# Altium PCB Board Assembly.PcbDoc (part 1 of 3)
Units mil, origin at the board's own origin, x right, y up, seen from the top; angles counter-clockwise.
Board outline 3645 x 2655 mil, 2 copper layers (Top Layer, Bottom Layer); 97 components, 111 nets, 464 pads, 100 vias.
Unrouted connection lines stored in the file: 11.
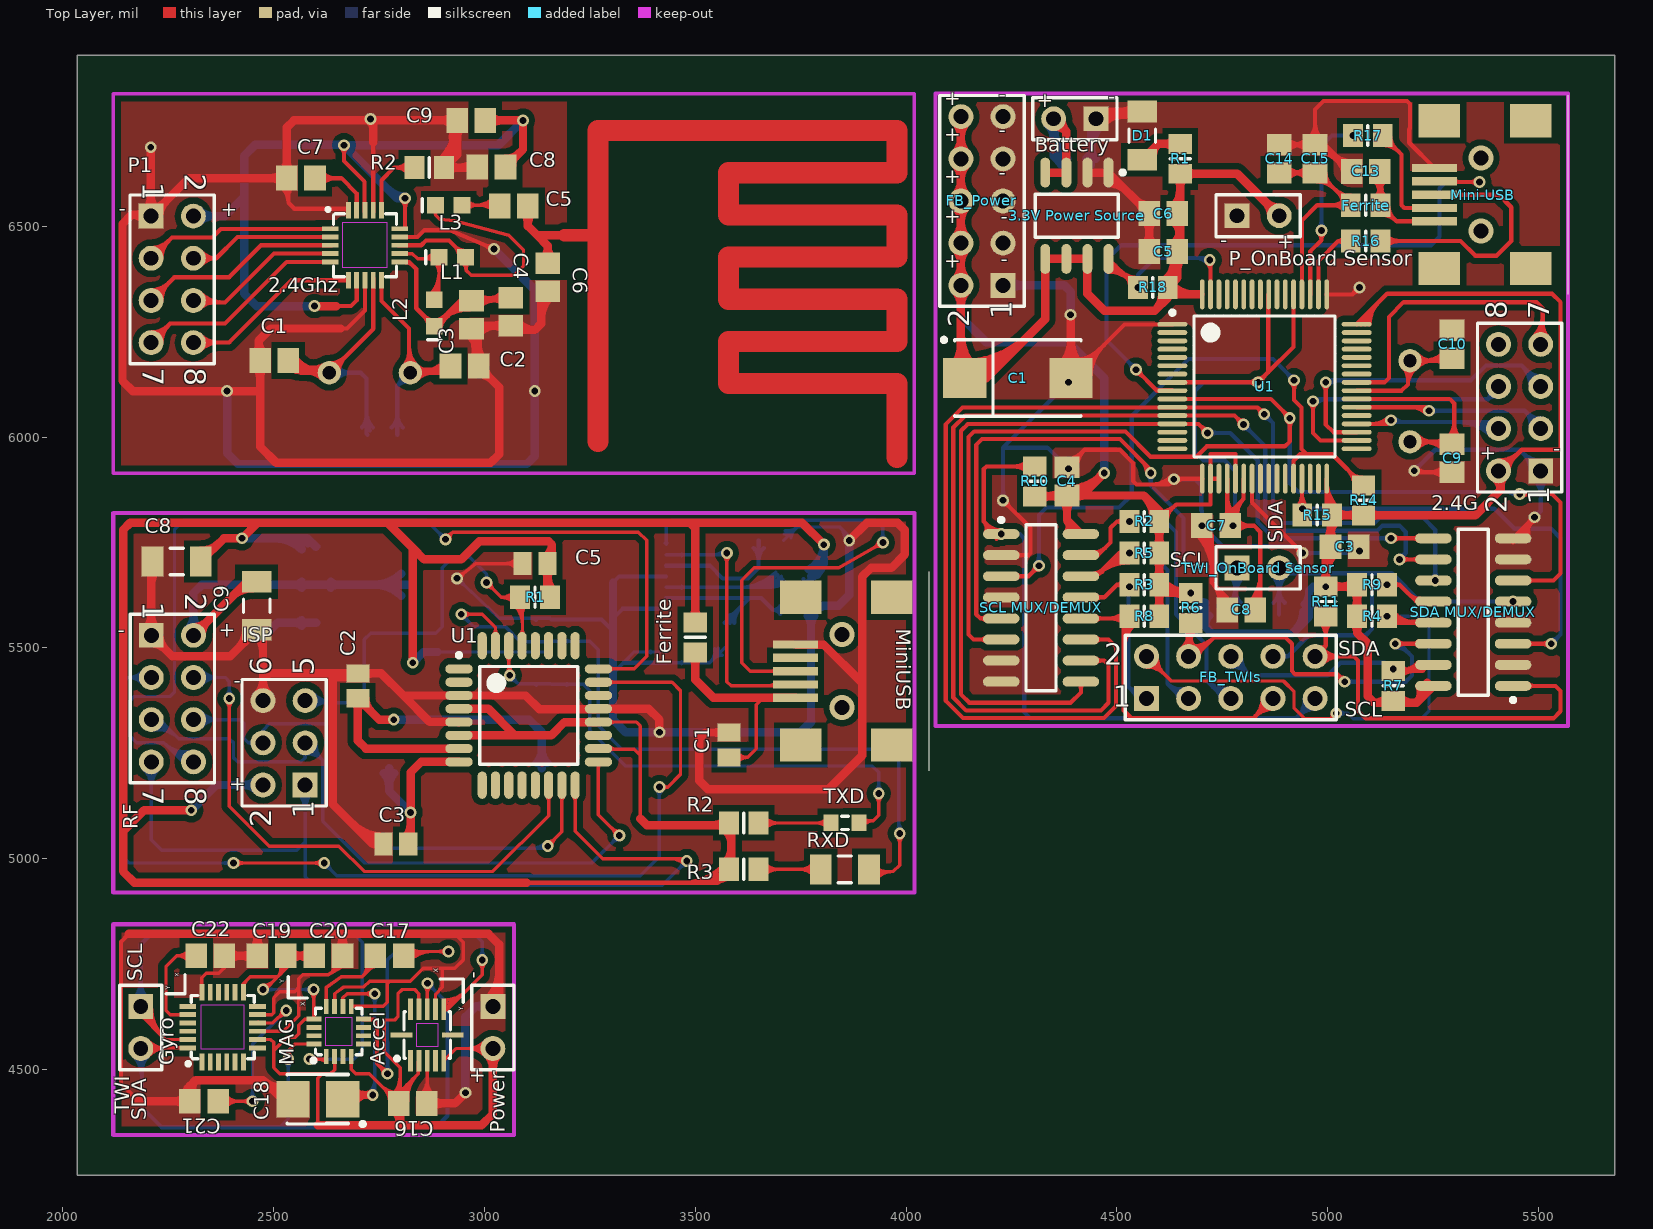
[diagram p0: Top Layer view]
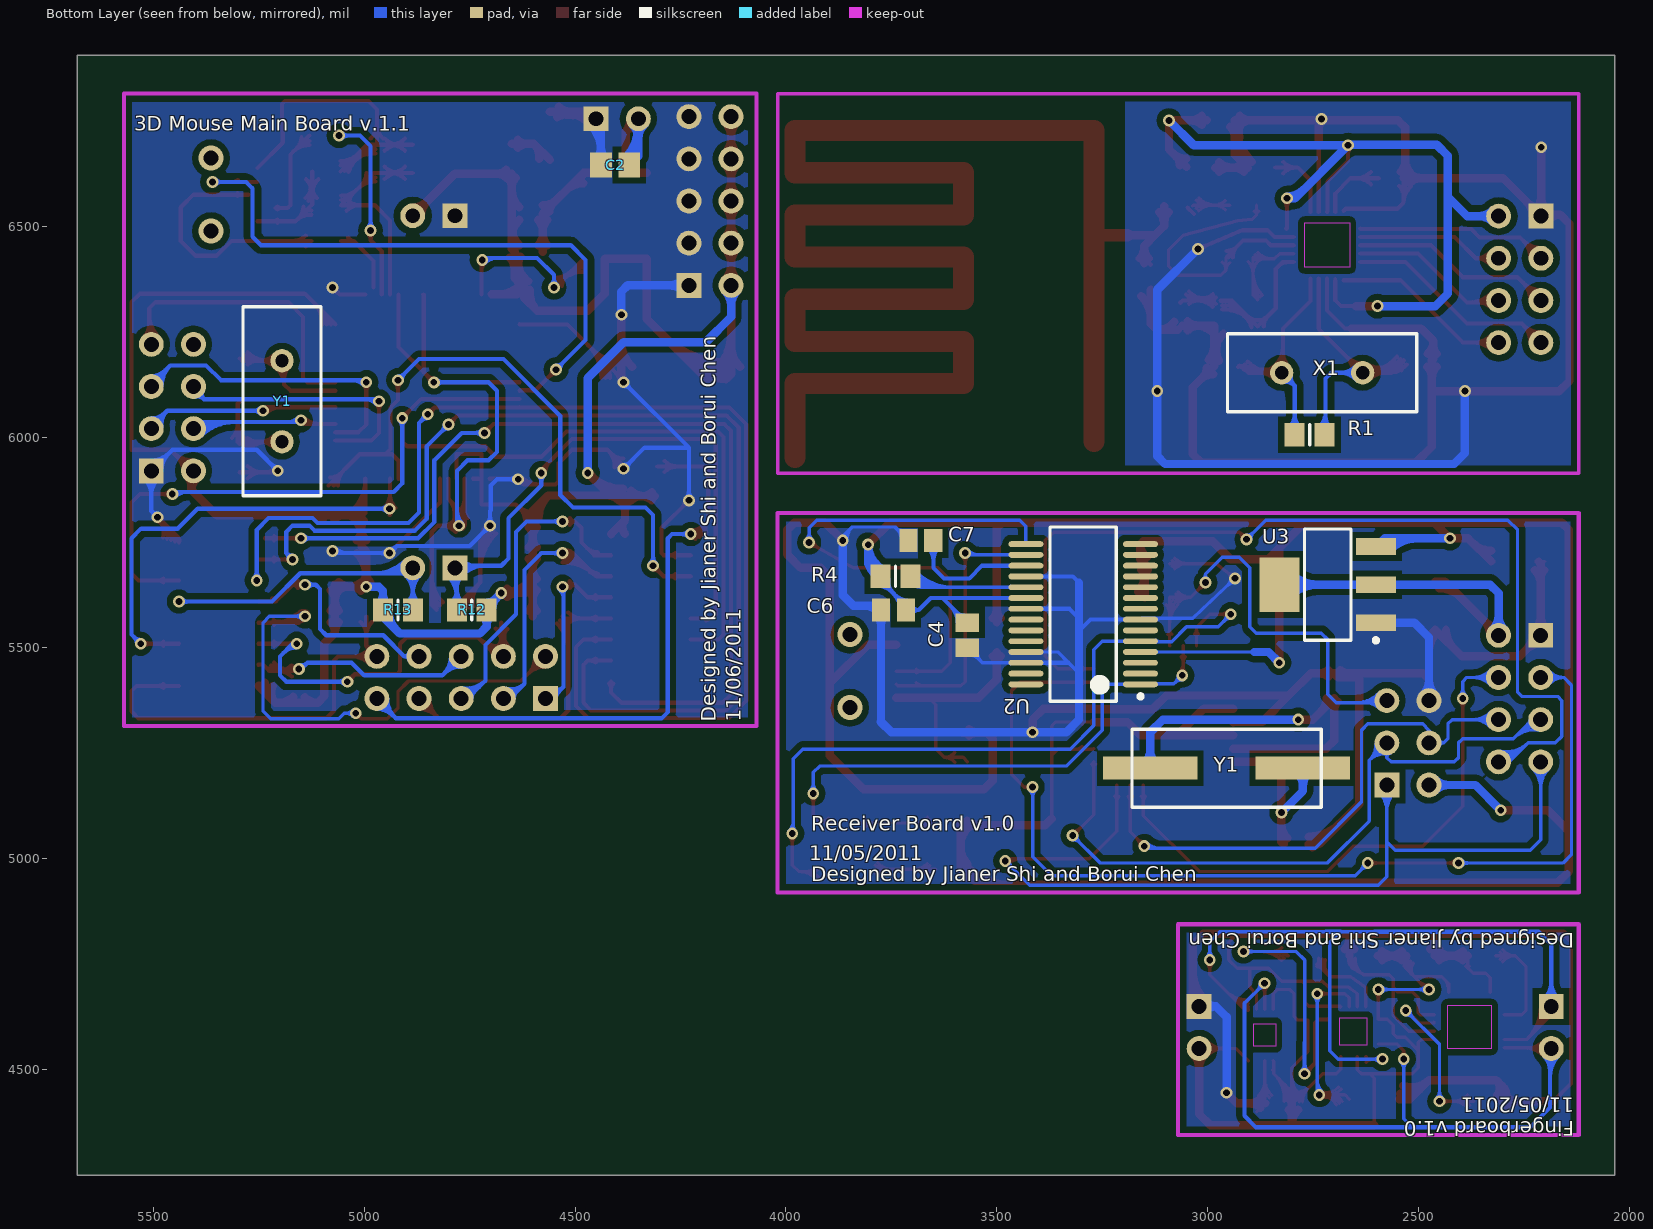
[diagram p1: Bottom Layer view, seen from below]

## Layer stack, top to bottom
Top Layer: signal copper 1.4
Dielectric: dielectric 12.6, FR-4, Dk 4.8
Bottom Layer: signal copper 1.4

## Board outline
2035,4250 5680,4250 5680,6905 2035,6905

## Design rules (kind name [scope] priority, off if disabled: settings)
Clearance "Polygon Clearance" [InPolygon] p1: gap=15
Clearance [All] p2: gap=8.1
HoleSize [All] p1: absolutevalues=TRUE maxlimit=100 minlimit=16 maxpercent=80.000 minpercent=20.000
MinimumAnnularRing [All] p1: minimumring=6
PolygonConnect [All] p1: connectstyle=Direct reliefconductorwidth=10 reliefentries=4 polygonreliefangle="90 Angle"
RoutingVias [All] p1: holewidth=16 width=28 viastyle="Through Hole" minholewidth=16 minwidth=27 maxholewidth=16 maxwidth=35
SilkscreenOverComponentPads [All] p1: minsilkscreentomaskgap=10
SolderMaskExpansion [All] p1: expansion=4
Width [All] p1: maxlimit=50 minlimit=8 preferedwidth=8
26 further rules are at their usual default settings.

## Components (designator, comment, footprint, x,y, rotation, side; value= is the part's Value field where it differs from the comment)
2.4G "Header 4X2" HDR2X4 5505,5920 r90 top
2.4Ghz "nRF24L01+" nRF24L01+ 2645.85,6494.23 r0 top (schematic designator "2.4Ghz Chip")
"3.3V Power Source" "TPS7333Q" SOIC127P600-8BN 4405,6525 r270 top
Accel "BMA180" "BMA180 - ECESHOP" 2825,4535 r0 top
Battery "Header 2" HDR1X2 4450,6755 r180 top
C1 "Cap Pol1" TC7343-2917 4265,6140 r0 top
C1 "Cap Semi" CAPC2012L 3580,5270 r90 top
C1 "Cap Semi" CAPC2012N 2501.5,6182.13 r0 top
C2 "Cap Semi" CAPC2012N 4405,6645 r180 bottom
C2 "Cap Semi" CAPC2012L 2700,5410 r270 top
C2 "Cap Semi" CAPC2012N 2953.04,6168.79 r180 top
C3 "Cap Semi" CAPC2012N 5040,5740 r180 top
C3 "Cap Semi" CAPC2012L 2790,5035 r0 top
C3 "Cap Semi" CAPC2012N 2969.33,6290.01 r90 top
C4 "Cap Semi" CAPC2012N 4381.54,5895 r270 top
C4 "Cap Semi" CAPC2012L 3570,5530 r90 bottom
C4 "Cap Semi" CAPC2012N 3062.56,6297.26 r90 top
C5 "Cap Semi" CAPC2012N 4610,6440 r0 top
C5 "Cap Semi" CAPC2012L 3120,5700 r0 top
C5 "Cap Semi" CAPC2012N 3069.81,6547.96 r180 top
C6 "Cap Semi" CAPC2012N 4610,6530 r0 top
C6 "Cap Semi" CAPC2012L 3745,5590 r180 bottom
C6 "Cap Semi" CAPC2012N 3150.31,6379.03 r90 top
C7 "Cap Semi" CAPC2012N 4735,5790 r0 top
C7 "Cap Semi" CAPC2012L 3680,5755 r0 bottom
C7 "Cap Semi" CAPC2012N 2564.69,6614.11 r0 top
C8 "Cap Semi" CAPC2012N 4795,5590 r0 top
C8 "Cap Pol3 TANT" capc3216n 2270,5705 r180 top
C8 "Cap Semi" CAPC2012N 3016.57,6640.58 r0 top
C9 "Cap Semi" CAPC2012N 5295,5950 r90 top
C9 "Cap Pol3 TANT" capc3216n 2460,5600 r270 top
C9 "Cap Semi" CAPC2012N 2968.71,6751.12 r0 top
C10 "Cap Semi" CAPC2012N 5295,6220 r270 top
C13 "Cap Semi" CAPC2012N 5090,6630 r180 top
C14 "Cap Semi" CAPC2012N 4885,6660 r90 top
C15 "Cap Semi" CAPC2012N 4970,6660 r90 top
C16 "Cap Semi" CAPC2012N 2830,4420 r180 top
C17 "Cap Semi" CAPC2012N 2775,4770 r180 top
C18 "Cap Pol1" TC3528-1411 2605,4430 r180 top
C19 "Cap Semi" CAPC2012N 2495,4770 r0 top
C20 "Cap Semi" CAPC2012N 2630,4770 r180 top
C21 "Cap Semi" CAPC2012N 2335,4425 r0 top
C22 "Cap Semi" CAPC2012N 2350,4770 r180 top
D1 "LED2" RESC3216N 4560,6715 r90 top
FB_Power "Header 5X2" HDR2X5 4230,6360 r90 top
FB_TWIs "Header 5X2" HDR2X5 4570,5380 r0 top
Ferrite "Ferrite Bead" RESC2012N 5090,6550 r180 top
Ferrite "Ferrite Bead 1A" RESC2012N 3500,5525 r90 top
Gyro "IMU3000" "IMU3000 - ECESHOP" 2330,4530 r90 top
ISP "Header 3X2" HDR2X3 2575,5175 r90 top
L1 "Inductor" INDC1608N 2923.75,6426.76 r0 top
L2 "Inductor" INDC1608N 2881.27,6294.15 r90 top
L3 "Inductor" INDC1608N 2915.46,6550.04 r0 top
MAG "HMC5883L" "HMC5883L - ECESHOP" 2625,4540 r90 top
Mini-USB "Mini USB" "MINI USB" 5570,6575 r180 top
MiniUSB "Mini USB" "MINI USB" 4055,5445 r180 top
P1 "Header 4X2" HDR2X4 2209.69,6524.11 r270 top
"P_OnBoard Sensor" "P_OnBoard Sensor" HDR1X2 4785,6525 r0 top
Power "Header 2" HDR1X2 3020,4650 r270 top
R1 "Res3" RESC2012N 4650,6660 r90 top
R1 "Res3" RESC2012N 3120,5620 r0 top
R1 "Res2" RESC2012N 2758.04,6005.61 r0 bottom
R2 "Res3" RESC2012N 4565,5800 r180 top
R2 "Res3" RESC2012N 3615,5085 r0 top
R2 "Res3" RESC2012N 2869.22,6639.11 r0 top
R3 "Res3" RESC2012N 4565,5650 r180 top
R3 "Res3" RESC2012N 3615,4975 r0 top
R4 "Res3" RESC2012N 5105,5575 r0 top
R4 "Res3" RESC2012N 3740,5670 r180 bottom
R5 "Res3" RESC2012N 4565,5725 r180 top
R6 "Res3" RESC2012N 4675,5595 r270 top
R7 "Res3" RESC2012N 5155,5410 r90 top
R8 "Res3" RESC2012N 4565,5575 r180 top
R9 "Res3" RESC2012N 5105,5650 r0 top
R10 "Res3" RESC2012N 4305,5895 r90 top
R11 "Res3" RESC2012N 4995,5610 r270 top
R12 "Res3" RESC2012N 4745,5590 r0 bottom
R13 "Res3" RESC2012N 4920,5590 r180 bottom
R14 "Res3" RESC2012N 5085,5850 r270 top
R15 "Res3" RESC2012N 4975,5815 r0 top
R16 "Res3" RESC2012N 5090,6465 r180 top
R17 "Res3" RESC2012N 5095,6715 r180 top
R18 "Res3" RESC2012N 4585,6355 r0 top
RF "Header 4X2" HDR2X4 2210,5530 r270 top (schematic designator "RF Board")
RXD "LED2" RESC3216N 3855,4975 r0 top
"SCL MUX/DEMUX" "74LV4051" SOIC127P600-16N 4320,5595 r0 top
"SDA MUX/DEMUX" "74LV4051" SOIC127P600-16N 5345,5585 r180 top
TWI "TWI" HDR1X2 2185,4650 r270 top
"TWI_OnBoard Sensor" "TWI_OnBoard Sensor" HDR1X2 4785,5690 r0 top
TXD "LED2" RESC1608N 3855,5085 r0 top
U1 "AT32UC3B0256-A2UT" "TQFP64_N - ECESHOP" 4850,6120 r0 top
U1 "ATmega8L-8AI" 32A_N 3105,5340 r0 top
U2 "FT232RL-Reel" SSOP-28_N 3295,5580 r0 bottom
U3 "LM1117MPX-3.3" MP04A_N 2715,5650 r0 bottom
X1 "16Mhz" "HC-49U - Through Hole" 2728.32,6152.63 r0 bottom
Y1 "XTAL 16Mhz" "HC-49U - Through Hole" 5195,6085 r270 bottom
Y1 "XTAL 8Mhz" "HC-49U - SMD" 2955,5215 r180 bottom

## Footprints (in the part's own frame and the unit in brackets; to place one, negate y for a bottom-side part, rotate by r counter-clockwise, add the part's x,y. Pads: shape width x height; smd on the part's side, far side on the other; paste and mask are expansions set on the pad)
32A_N [mm] "Thin QFP, 32-Leads, Body 7x7mm, Pitch 0.8mm, IPC Medium Density"
  oval 1.65x0.55 smd: 1(-4.2,2.8) 2(-4.2,2) 3(-4.2,1.2) 4(-4.2,0.4) 5(-4.2,-0.4) 6(-4.2,-1.2) 7(-4.2,-2) 8(-4.2,-2.8) 17(4.2,-2.8) 18(4.2,-2) 19(4.2,-1.2) 20(4.2,-0.4) 21(4.2,0.4) 22(4.2,1.2) 23(4.2,2) 24(4.2,2.8)
  oval 0.55x1.65 smd: 9(-2.8,-4.2) 10(-2,-4.2) 11(-1.2,-4.2) 12(-0.4,-4.2) 13(0.4,-4.2) 14(1.2,-4.2) 15(2,-4.2) 16(2.8,-4.2) 25(2.8,4.2) 26(2,4.2) 27(1.2,4.2) 28(0.4,4.2) 29(-0.4,4.2) 30(-1.2,4.2) 31(-2,4.2) 32(-2.8,4.2)
  silkscreen extent -4.32,-2.95 2.95,3.75, body extent -3.5,-3.5 3.5,3.5, height 1.2
"BMA180 - ECESHOP" [mm] "BMA180 - ECESHOP"
  rect 0.29x1.3 smd: 1(0,-0.35) 2(0.5,-0.35) 3(1,-0.35) 4(1.5,-0.35) 5(2,-0.35) 7(2,2.75) 8(1.5,2.75) 9(1,2.75) 10(0.5,2.75) 11(0,2.75)
  rect 1.3x0.32 smd: 6(2.55,1.2) 12(-0.55,1.2)
  Keep-Out Layer region: 0.328,0.524 1.658,0.524 1.658,1.876 0.328,1.876
  silkscreen extent -0.91,-0.31 2.4,2.6
CAPC2012L [mm] "Chip Capacitor, Body 2.0x1.3mm, IPC High Density"
  rect 1.1x1.4 smd: 1(-0.75,0) 2(0.75,0)
  body extent -1.1,-0.72 1.1,0.72, height 1.1
CAPC2012N [mm] "Chip Capacitor, Body 2.0x1.3mm, IPC Medium Density"
  rect 1.3x1.5 smd: 1(-0.85,0) 2(0.85,0)
  body extent -1.1,-0.72 1.1,0.72, height 1.1
capc3216n [mm] "Chip Capacitor, Body 3.2x1.6mm, IPC Medium Density"
  rect 1.3x1.8 smd: 1(-1.45,0) 2(1.45,0)
  silkscreen extent -0.4,-0.8 0.4,0.8, body extent -1.7,-0.9 1.7,0.9, height 1.35
"HC-49U - SMD" [mm] "Quartz Crystal, Thru-Hole; 2 Leads; Body 11.35 x 4.65 x 13.46 mm (LxWxH max)"
  rect 5.7x1.4 smd: 1(-4.6,0) 2(4.6,0)
  silkscreen extent -5.7,-2.35 5.7,2.35
"HC-49U - Through Hole" [mm] "Quartz Crystal, Thru-Hole; 2 Leads; Body 11.35 x 4.65 x 13.46 mm (LxWxH max)"
  round 1.4 hole 0.8: 1(-2.44,0) 2(2.44,0)
  silkscreen extent -5.7,-2.35 5.7,2.35
HDR1X2 [mm] "Connector; Header; 2 Position"
  rect 1.5x1.5 hole 0.9: 1(0,0)
  round 1.5 hole 0.9: 2(2.54,0)
  silkscreen extent -1.27,-1.27 3.81,1.27
HDR2X3 [mm] "Connector; Header; 3x2 Position"
  rect 1.5x1.5 hole 0.9: 1(0,0)
  round 1.5 hole 0.9: 2(0,2.54) 3(2.54,0) 4(2.54,2.54) 5(5.08,0) 6(5.08,2.54)
  silkscreen extent -1.27,-1.27 6.35,3.81
HDR2X4 [mm] "Connector; Header; 4x2 Position"
  rect 1.5x1.5 hole 0.9: 1(0,0)
  round 1.5 hole 0.9: 2(0,2.54) 3(2.54,0) 4(2.54,2.54) 5(5.08,0) 6(5.08,2.54) 7(7.62,0) 8(7.62,2.54)
  silkscreen extent -1.27,-1.27 8.89,3.81
HDR2X5 [mm] "Connector; Header; 5x2 Position"
  rect 1.5x1.5 hole 0.9: 1(0,0)
  round 1.5 hole 0.9: 2(0,2.54) 3(2.54,0) 4(2.54,2.54) 5(5.08,0) 6(5.08,2.54) 7(7.62,0) 8(7.62,2.54) 9(10.16,0) 10(10.16,2.54)
  silkscreen extent -1.27,-1.27 11.43,3.81
"HMC5883L - ECESHOP" [mm]
  rect 0.9x0.29 smd: 1(-0.225,0) 2(-0.225,-0.5) 3(-0.225,-1) 4(-0.225,-1.5) 9(2.775,-1.5) 10(2.775,-1) 11(2.775,-0.5) 12(2.775,0)
  rect 0.29x0.9 smd: 5(0.525,-2.25) 6(1.025,-2.25) 7(1.525,-2.25) 8(2.025,-2.25) 13(2.025,0.75) 14(1.525,0.75) 15(1.025,0.75) 16(0.525,0.75)
  Keep-Out Layer region: 0.452,-1.572 2.099,-1.572 2.099,0.075 0.452,0.075
  silkscreen extent -0.57,-2.15 2.67,0.87
"IMU3000 - ECESHOP" [mm]
  rect 1x0.29 smd: 1(-0.3,0) 2(-0.3,-0.5) 3(-0.3,-1) 4(-0.3,-1.5) 5(-0.3,-2) 6(-0.3,-2.5) 13(3.9,-2.5) 14(3.9,-2) 15(3.9,-1.5) 16(3.9,-1) 17(3.9,-0.5) 18(3.9,0)
  rect 0.29x1 smd: 7(0.55,-3.35) 8(1.05,-3.35) 9(1.55,-3.35) 10(2.05,-3.35) 11(2.55,-3.35) 12(3.05,-3.35) 19(3.05,0.85) 20(2.55,0.85) 21(2.05,0.85) 22(1.55,0.85) 23(1.05,0.85) 24(0.55,0.85)
  Keep-Out Layer region: 0.488,-2.562 3.109,-2.562 3.109,0.066 0.488,0.066
  silkscreen extent -0.48,-3.15 3.7,0.9
INDC1608N [mm] "Chip Inductor, Body 1.6x0.8mm, IPC Medium Density"
  rect 1x1 smd: 1(-0.8,0) 2(0.8,0)
  silkscreen extent -1.6,-0.4 -1.6,0.4, body extent -0.87,-0.48 0.87,0.48, height 0.71
"MINI USB" [mm] "Digikey http://search.digikey.com/us/en/products/1734035-2/A31727CT-ND/773789"
  rect 2.7x0.5 smd: 1(8.05,1.6) 2(8.05,0.8) 3(8.05,0) 4(8.05,-0.8) 5(8.05,-1.6)
  rect 2.5x2 smd: NC(2.25,4.45) NC(2.25,-4.45) NC(7.75,-4.45) NC(7.75,4.45)
  silkscreen extent 0,-6 0,6
MP04A_N [mm] "SOT223, 4-Leads, Body 6.5x3.5mm, Pitch 2.3mm, Lead Span 7mm, IPC Medium Density"
  rect 2.4x1 smd: 1(-2.9,2.3) 2(-2.9,0) 3(-2.9,-2.3)
  rect 2.4x3.3 smd: 4(2.9,0)
  silkscreen extent -3.02,-3.35 1.4,3.47, body extent -1.85,-3.35 1.85,3.35, height 1.8
nRF24L01+ [mm]
  rect 1x0.29 smd: 1(-0.3,0) 2(-0.3,-0.5) 3(-0.3,-1) 4(-0.3,-1.5) 5(-0.3,-2) 11(3.9,-2) 12(3.9,-1.5) 13(3.9,-1) 14(3.9,-0.5) 15(3.9,0)
  rect 0.29x1 smd: 6(0.8,-3.1) 7(1.3,-3.1) 8(1.8,-3.1) 9(2.3,-3.1) 10(2.8,-3.1) 16(2.8,1.1) 17(2.3,1.1) 18(1.8,1.1) 19(1.3,1.1) 20(0.8,1.1)
  Keep-Out Layer region: 0.447,-2.334 3.152,-2.334 3.152,0.357 0.447,0.357
  silkscreen extent -0.49,-2.9 3.7,1.22
RESC1608N [mm] "Chip Resistor, Body 1.6x0.8mm, IPC Medium Density"
  rect 0.9x1 smd: 1(-0.85,0) 2(0.85,0)
  silkscreen extent -0.2,-0.4 0.2,0.4, body extent -0.85,-0.48 0.85,0.48, height 0.6
RESC2012N [mm] "Chip Resistor, Body 2.0x1.3mm, IPC Medium Density"
  rect 1.2x1.4 smd: 1(-0.9,0) 2(0.9,0)
  silkscreen extent 0,-0.6 0,0.6, body extent -1.07,-0.7 1.07,0.7, height 0.65
RESC3216N [mm] "Chip Resistor, Body 3.2x1.6mm, IPC Medium Density"
  rect 1.3x1.8 smd: 1(-1.45,0) 2(1.45,0)
  silkscreen extent -0.4,-0.8 0.4,0.8, body extent -1.68,-0.87 1.68,0.87, height 0.71
SOIC127P600-8BN [mm] "SOIC, 8-Leads, Body 4.9x3.9mm, Pitch 1.27mm, IPC Medium Density"
  oval 1.8x0.6 smd: 1(-2.6,1.905) 2(-2.6,0.635) 3(-2.6,-0.635) 4(-2.6,-1.905) 5(2.6,-1.905) 6(2.6,-0.635) 7(2.6,0.635) 8(2.6,1.905)
  silkscreen extent -2.72,-2.5 1.3,2.88, body extent -2,-2.5 2,2.5, height 2.59
SOIC127P600-16N [mm] "SOIC, 16-Leads, Body 9.9x3.9mm, Pitch 1.27mm, IPC Medium Density"
  oval 2.2x0.6 smd: 1(-2.4,4.445) 2(-2.4,3.175) 3(-2.4,1.905) 4(-2.4,0.635) 5(-2.4,-0.635) 6(-2.4,-1.905) 7(-2.4,-3.175) 8(-2.4,-4.445) 9(2.4,-4.445) 10(2.4,-3.175) 11(2.4,-1.905) 12(2.4,-0.635) 13(2.4,0.635) 14(2.4,1.905) 15(2.4,3.175) 16(2.4,4.445)
  silkscreen extent -2.52,-5 0.9,5.42, body extent -2,-5 2,5, height 1.75
SSOP-28_N [mm] "SOP, 28-Leads, Body 10.2x5.3mm, Pitch 0.65mm, IPC Medium Density"
  oval 2.1x0.35 smd: 1(-3.45,4.225) 2(-3.45,3.575) 3(-3.45,2.925) 4(-3.45,2.275) 5(-3.45,1.625) 6(-3.45,0.975) 7(-3.45,0.325) 8(-3.45,-0.325) 9(-3.45,-0.975) 10(-3.45,-1.625) 11(-3.45,-2.275) 12(-3.45,-2.925) 13(-3.45,-3.575) 14(-3.45,-4.225) 15(3.45,-4.225) 16(3.45,-3.575) 17(3.45,-2.925) 18(3.45,-2.275) 19(3.45,-1.625) 20(3.45,-0.975) 21(3.45,-0.325) 22(3.45,0.325) 23(3.45,0.975) 24(3.45,1.625) 25(3.45,2.275) 26(3.45,2.925) 27(3.45,3.575) 28(3.45,4.225)
  silkscreen extent -3.57,-5.25 2,5.25, body extent -2.8,-5.25 2.8,5.25, height 2
TC3528-1411 [mm] "Capacitor, SM Tantalum; Body 3.5 x 2.8 mm (LxW typ)"
  rect 2x2.2 smd: 1(-1.5,0) 2(1.5,0)
  silkscreen extent -2.83,-1.5 1.85,1.62
TC7343-2917 [mm] "Capacitor, SM Tantalum; Body 7.3 x 4.3 mm (LxW typ)"
  rect 2.6x2.4 smd: 1(-3.2,0) 2(3.2,0)
  silkscreen extent -4.57,-2.3 3.8,2.42
"TQFP64_N - ECESHOP" [mm] "Thin QFP, 64-Leads, Body 10x10mm, Pitch 0.5mm, IPC Medium Density"
  oval 1.8x0.29 smd: 1(-5.55,3.75) 2(-5.55,3.25) 3(-5.55,2.75) 4(-5.55,2.25) 5(-5.55,1.75) 6(-5.55,1.25) 7(-5.55,0.75) 8(-5.55,0.25) 9(-5.55,-0.25) 10(-5.55,-0.75) 11(-5.55,-1.25) 12(-5.55,-1.75) 13(-5.55,-2.25) 14(-5.55,-2.75) 15(-5.55,-3.25) 16(-5.55,-3.75) 33(5.55,-3.75) 34(5.55,-3.25) 35(5.55,-2.75) 36(5.55,-2.25) 37(5.55,-1.75) 38(5.55,-1.25) 39(5.55,-0.75) 40(5.55,-0.25) 41(5.55,0.25) 42(5.55,0.75) 43(5.55,1.25) 44(5.55,1.75) 45(5.55,2.25) 46(5.55,2.75) 47(5.55,3.25) 48(5.55,3.75)
  oval 0.29x1.8 smd: 17(-3.75,-5.55) 18(-3.25,-5.55) 19(-2.75,-5.55) 20(-2.25,-5.55) 21(-1.75,-5.55) 22(-1.25,-5.55) 23(-0.75,-5.55) 24(-0.25,-5.55) 25(0.25,-5.55) 26(0.75,-5.55) 27(1.25,-5.55) 28(1.75,-5.55) 29(2.25,-5.55) 30(2.75,-5.55) 31(3.25,-5.55) 32(3.75,-5.55) 49(3.75,5.55) 50(3.25,5.55) 51(2.75,5.55) 52(2.25,5.55) 53(1.75,5.55) 54(1.25,5.55) 55(0.75,5.55) 56(0.25,5.55) 57(-0.25,5.55) 58(-0.75,5.55) 59(-1.25,5.55) 60(-1.75,5.55) 61(-2.25,5.55) 62(-2.75,5.55) 63(-3.25,5.55) 64(-3.75,5.55)
  silkscreen extent -5.67,-4.25 4.25,4.57, body extent -5,-5 5,5, height 1.2

## Part data
2.4G P1 RF: "Header, 4-Pin, Dual row"
Battery Power: "Header, 2-Pin"
C1 C18: "Polarized Capacitor (Radial)"
C1 C1 C2 C2 C2 C3 C3 C3 C4 C4 C4 C5 C5 C5 C6 C6 C6 C7 C7 C7 C8 C8 C9 C9 C10 C13 C14 C15 C16 C17 C19 C20 C21 C22: "Capacitor (Semiconductor SIM Model)"
C8 C9: library part "Cap Pol3", "Polarized Capacitor (Surface Mount)"
D1 RXD TXD: "Typical RED, GREEN, YELLOW, AMBER GaAs LED"
FB_Power FB_TWIs: "Header, 5-Pin, Dual row"
Ferrite: library part "Ferrite Bead"
ISP: "Header, 3-Pin, Dual row"
"P_OnBoard Sensor" TWI "TWI_OnBoard Sensor": library part "Header 2", "Header, 2-Pin"
R1 R1 R1 R2 R2 R2 R3 R3 R4 R4 R5 R6 R7 R8 R9 R10 R11 R12 R13 R14 R15 R16 R17 R18: "Resistor"
U1: "32-bit AVR UC3 B Series Microcontroller, 256KB Flash, 32KB SRAM, 44 GPIO pins, Industrial Grade, 64-Pin TQFP, Tray"
U1: "8-Bit AVR Microcontroller with 8K Bytes of In-System Programmable Flash Memory"
U2: "USB UART Asynchronous Serial Data Transfer Chip, SSOP-28, Tape and Reel"
U3: "800mA Low-Dropout Linear Regulator, 4-pin SOT-223"
X1 Y1 Y1: library part XTAL, "Crystal Oscillator"

## Via types
v1: diameter 28, hole 16, Top Layer to Bottom Layer, 96 vias
v2: diameter 59.06, hole 35.43, Top Layer to Bottom Layer, 4 vias

## Nets (pads, with @x,y where several pads share a name; then routed paths per layer and width w, separated by ;. In a path a pad name is that pad's centre, name@x,y a point inside that pad or via, vN(x,y) a via of type N, cw(c..) or ccw(c..) an arc to the next point about the centre after c; other vN are vias at no path point)
3.3VCC: 2.4G.2 2.4Ghz.7 2.4Ghz.15 2.4Ghz.18 "3.3V Power Source.5" "3.3V Power Source.6" "3.3V Power Source.7" "P_OnBoard Sensor.2" "SCL MUX/DEMUX.16" "SDA MUX/DEMUX.16" Accel.2 Accel.5 Accel.10 C1.1@4139.02,6140 C3.2@5006.54,5740 C4.2@4381.54,5861.54 C5.2@4643.46,6440 C6.2@4643.46,6530 C8.2@3050.03,6640.58 C9.1@2460,5657.09 C9.2@3002.17,6751.12 C16.2 C19.2 C20.2 FB_Power.2 FB_Power.4 FB_Power.6 FB_Power.8 FB_Power.10 Gyro.8 Gyro.13 MAG.2 MAG.4 MAG.13 P1.2 Power.2 R1.1@4650,6624.57 R2.1@4600.43,5800 R3.1@4600.43,5650 R4.1@5069.57,5575 R5.1 R6.1 R7.1 R8.1 R9.1 R10.1 R11.1 R12.1 R13.1 R14.2 R15.2 R18.2 RF.2 U1.18@4722.05,5901.5 U1.19@4741.73,5901.5 U1.21@4781.1,5901.5 U1.32@4997.64,5901.5 U1.48 U1.64 U3.2 U3.4 | length 18740.1
  Top Layer w8: Gyro.13@2428.43,4683.54 2428.43,4703.43 2445,4720 2510,4720 ; Gyro.13@2430.13,4697.52 cw(c2448.52,4697.52) 2435.52,4710.52 ; Gyro.8@2461.89,4571.34 2493.66,4571.34 2500,4565 2500,4545.37 ; v1(2475,4690) 2480,4690 2510,4720 ; v1@2475,4700 ccw(c2475,4736.21) 2500.61,4710.61 ; v1@2485,4690 cw(c2497.07,4690) 2488.54,4698.54 ; C19.2@2511.69,4752.47 cw(c2492.83,4737.17) 2510,4720 ; 2516.28,4726.28 ccw(c2499.76,4742.8) C19.2@2517.91,4757.5 ; 2522.56,4732.56 ccw(c2506.7,4748.42) C19.2@2524.12,4762.54 ; C19.2@2525.9,4744.63 cw(c2525.34,4740) 2530,4740 ; C19.2@2528.46,4770 2530,4768.46 2530,4740 ; 2528.84,4738.84 ccw(c2513.64,4754.04) C19.2@2530.34,4767.58 ; C19.2@2534,4745.19 ccw(c2535.37,4740) 2530,4740 ; v1@2587.93,4682.93 cw(c2569.72,4664.72) 2595.47,4664.72 ; v1(2595,4690) 2595.47,4689.53 MAG.13@2595.47,4619.72 2574.35,4619.72 2560,4605.37 2560,4585 2551.77,4576.77 2531.4,4576.77 2500,4545.37 ; 2595.47,4667 cw(c2618,4667) v1@2602.07,4682.93 ; 2605,4368.1 2605,4480 2615,4490 ; MAG.2@2644.68,4531.14 2644.68,4500.31 2645,4500 2635,4490 2615,4490 ; MAG.4@2684.05,4531.14 2684.05,4500.94 2695,4490 2726.86,4490 C16.2@2796.54,4420.33 ; 2.4Ghz.7@2697.03,6372.18 2.4Ghz.7@2697.03,6376.12 ; 2753.51,4463.35 ccw(c2796.54,4506.37) C16.2@2796.54,4445.53 ; 2762.23,4454.63 cw(c2731.54,4423.94) C16.2@2774.94,4423.94 ; 2767.17,4449.69 ccw(c2796.54,4479.06) C16.2@2796.54,4437.53 ; C16.2@2775.89,4440.97 cw(c2758.85,4423.94) C16.2@2782.94,4423.94 ; C16.2@2781.27,4439.2 ccw(c2736.05,4484.43) 2800,4484.43 ; C16.2@2786.93,4433.55 ccw(c2755.36,4465.11) 2800,4465.11 ; C16.2@2794.13,4423.79 cw(c2832.03,4426.14) 2805.18,4452.99 ; C16.2@2796.54,4420 C16.2@2796.54,4420.33 ; C16.2@2800,4426.54 C16.2@2800,4447.81 ; 2800,4467.7 ccw(c2840.3,4467.7) C16.2@2811.8,4439.2 ; 2800,4490 2800,4505 2762.1,4542.9 2762.1,4617.66 2787.66,4617.66 2795,4625 2795,4680 2805,4690 2835,4690 2844.68,4680.31 Accel.10@2844.68,4643.27 ; 2800,4500 C16.2@2800,4447.81 ; C16.2@2802.12,4424.28 cw(c2855.64,4427.61) 2817.72,4465.53 ; C16.2@2810.1,4424.78 cw(c2879.26,4429.07) 2830.26,4478.07 ; C16.2@2818.08,4425.27 cw(c2902.88,4430.54) 2842.81,4490.62 ; 2842.81,4492.68 cw(c2853.34,4492.68) Accel.2@2845.89,4500.13 ; Accel.2@2844.68,4521.22 2842.81,4519.34 2842.81,4490.62 ; Accel.5@2903.74,4521.22 2932.52,4550 Power.2@3020,4550 ; Power.2@3001.95,4531.95 ccw(c2958.37,4488.37) 2958.37,4550 ccw(c2958.37,4611.63) Power.2@3001.95,4568.05 ; Power.2@3007.61,4537.61 ccw(c2977.68,4507.68) 2977.68,4550 ccw(c2977.68,4592.32) Power.2@3007.61,4562.39 ; 2500,4545.37 2500,4505 2515,4490 2615,4490 ; 2510,4720 2530,4740 ; C16.2@2796.54,4420.33 2796.54,4444.34 C16.2@2800,4447.81 ; C16.2@2800,4447.81 2842.81,4490.62
  Top Layer w10: 2648.89,6311.1 2683.75,6311.1 2697.03,6324.38 2.4Ghz.7@2697.03,6372.18 ; v1@2660.62,6685.88 cw(c2645.25,6670.51) 2666.98,6670.51 cw(c2688.71,6670.51) v1@2673.34,6685.88 ; v1(2666.98,6692.24) 2666.98,6654.67 2715.84,6605.81 2715.84,6534.48 2.4Ghz.18@2716.72,6533.6 ; v1@2805.41,6559.89 cw(c2790.04,6544.52) 2811.77,6544.52 cw(c2833.5,6544.52) v1@2818.13,6559.89 ; 2.4Ghz.15@2811.77,6499.8 ccw(c2818.94,6499.8) 2.4Ghz.15@2813.87,6494.73 ; v1(2811.77,6566.25) 2811.77,6495.19 2.4Ghz.15@2812.73,6494.23 ; v1@3091.46,6751.12 v1(3091.57,6751.01) ; R2.1@4600.43,5800 4640.43,5840 4722.05,5840 U1.18@4722.05,5901.5 ; R2.1@4600.43,5812.56 ccw(c4600.43,5842.88) R2.1@4621.87,5821.44 ; R2.1@4600.43,5822.56 ccw(c4600.43,5877.02) 4638.94,5838.51 ; R2.1@4619.06,5803.94 cw(c4654.51,5803.94) 4629.44,5829.01 ; U1.19@4741.73,5901.5 U1.18@4722.05,5901.5 ; U1.21@4781.1,5901.5 4781.1,5960 4722.05,5960 U1.18@4722.05,5901.5 ; 4997.64,5846.5 ccw(c5038,5846.5) R15.2@5009.46,5817.96 ; U1.32@4997.64,5870.64 ccw(c5062.14,5870.64) R15.2@5016.53,5825.03 ; U1.32@4997.64,5894.79 ccw(c5086.28,5894.79) R15.2@5023.6,5832.1 ; U1.32@4997.64,5901.5 4997.64,5820 R15.2@5006.54,5811.1 ; U1.48@5068.5,6267.64 5140.87,6340 5531.9,6340 5551.9,6320 5551.9,5970 5460,5970 2.4G.2@5410,5920 ; U1.48@5068.94,6267.64 cw(c5069.98,6267.64) U1.48@5069.24,6268.38 ; U1.48@5078.94,6267.64 cw(c5104.12,6267.64) 5086.31,6285.45 ; U1.48@5088.94,6267.64 cw(c5138.27,6267.64) 5103.39,6302.52 ; U1.48@5098.94,6267.64 cw(c5172.41,6267.64) 5120.46,6319.59 ; 2.4G.2@5405,5934.53 ccw(c5405,5981.67) 5438.34,5948.34 ; 2.4G.2@5405,5944.53 ccw(c5405,6015.81) 5455.41,5965.41 ; 2.4G.2@5429.53,5920 cw(c5476.67,5920) 5443.34,5953.34
  Top Layer w20: RF.2@2310,5530 2437.09,5657.09 C9.1@2460,5657.09 ; RF.2@2310,5549.53 ccw(c2310,5596.67) 2343.34,5563.34 ccw(c2376.67,5530) RF.2@2329.53,5530 ; 2401.23,5621.23 cw(c2450.16,5572.3) C9.1@2450.16,5641.5 ; C19.2@2528.46,4770 C20.2@2596.54,4770 ; C19.2@2539.49,4758.98 cw(c2566.1,4732.36) 2566.1,4770 cw(c2566.1,4807.64) C19.2@2539.49,4781.02 ; C20.2@2585.51,4758.98 ccw(c2558.9,4732.36) 2558.9,4770 ccw(c2558.9,4807.64) C20.2@2585.51,4781.02 ; v1(2597.2,6310.63) 2648.42,6310.63 ; 2605,4368.1 2800,4368.1 ; C16.2@2785.51,4405.04 cw(c2750.53,4370.06) 2800,4370.06 ; 2800,4386.79 cw(c2825.81,4386.79) C16.2@2807.56,4405.04 ; C16.2@2800,4426.54 2800,4368.1 ; C9.2@3002.17,6751.12 3091.46,6751.12 3091.46,6682.01 C8.2@3050.03,6640.58 ; Power.2@3006.19,4536.19 cw(c2972.86,4502.86) 3020,4502.86 cw(c3067.14,4502.86) Power.2@3033.81,4536.19 ; C9.2@3013.2,6740.1 cw(c3039.81,6713.48) 3039.81,6751.12 cw(c3039.81,6788.76) C9.2@3013.2,6762.14 ; Power.2@3020,4550 3020,4395 2993.1,4368.1 2800,4368.1 ; C8.2@3050.03,6660.11 ccw(c3050.03,6707.25) 3083.37,6673.92 ; C8.2@3065.63,6644.52 cw(c3093.76,6644.52) C8.2@3073.87,6664.41 ; C1.1@4108.74,6166.34 ccw(c4057.42,6217.65) 4130,6217.65 ; FB_Power.2@4116.19,6346.19 cw(c4082.86,6312.86) 4130,6312.86 cw(c4177.14,6312.86) FB_Power.2@4143.81,6346.19 ; FB_Power.2@4116.19,6373.81 ccw(c4082.86,6407.14) 4130,6407.14 ccw(c4177.14,6407.14) FB_Power.2@4143.81,6373.81 ; FB_Power.4@4116.19,6446.19 cw(c4082.86,6412.86) 4130,6412.86 cw(c4177.14,6412.86) FB_Power.4@4143.81,6446.19 ; FB_Power.4@4116.19,6473.81 ccw(c4082.86,6507.14) 4130,6507.14 ccw(c4177.14,6507.14) FB_Power.4@4143.81,6473.81 ; FB_Power.6@4116.19,6546.19 cw(c4082.86,6512.86) 4130,6512.86 cw(c4177.14,6512.86) FB_Power.6@4143.81,6546.19 ; FB_Power.6@4116.19,6573.81 ccw(c4082.86,6607.14) 4130,6607.14 ccw(c4177.14,6607.14) FB_Power.6@4143.81,6573.81 ; FB_Power.8@4116.19,6646.19 cw(c4082.86,6612.86) 4130,6612.86 cw(c4177.14,6612.86) FB_Power.8@4143.81,6646.19 ; FB_Power.8@4116.19,6673.81 ccw(c4082.86,6707.14) 4130,6707.14 ccw(c4177.14,6707.14) FB_Power.8@4143.81,6673.81 ; FB_Power.10@4116.19,6746.19 cw(c4082.86,6712.86) 4130,6712.86 cw(c4177.14,6712.86) FB_Power.10@4143.81,6746.19 ; 4130,6193.89 ccw(c4188.97,6193.89) C1.1@4147.27,6152.19 ; 4130,6242.18 ccw(c4237.26,6242.18) C1.1@4161.41,6166.34 ; FB_Power.10@4130,6760 FB_Power.8@4130,6660 FB_Power.6@4130,6560 FB_Power.4@4130,6460 FB_Power.2@4130,6360 4130,6149.02 C1.1@4139.02,6140 4190,6140 4330,6280 4330,6422.64 4380,6422.64 4430,6422.64 4430,6340 4470,6300 4590,6300 ; C1.1@4142.95,6137.24 ccw(c4142.95,6244.17) 4218.56,6168.56 ; C1.1@4142.95,6157.24 ccw(c4142.95,6312.46) 4252.71,6202.7 ; C1.1@4142.95,6177.24 ccw(c4142.95,6380.74) 4286.85,6236.85 ; R10.1@4310.43,5860 4380,5860 C4.2@4381.54,5861.54 ; R10.1@4318.57,5849.93 cw(c4342.87,5825.64) 4342.87,5860 ; R10.1@4318.57,5869.2 ccw(c4340.78,5891.41) 4340.78,5860 ; 4336.25,5860 ccw(c4336.25,5902.88) C4.2@4366.57,5872.56 ; 4343.67,5860 cw(c4343.67,5827.6) C4.2@4366.57,5850.51 ; C4.2@4370.51,5850.51 cw(c4343.9,5823.9) 4381.54,5823.9 cw(c4419.17,5823.9) C4.2@4392.56,5850.51 ; 4381.7,5771.27 ccw(c4365.61,5787.03) 4381.54,5802.95 ; C4.2@4385.47,5857.13 ccw(c4385.47,5921.47) 4430.97,5875.97 ; C4.2@4385.47,5877.13 ccw(c4385.47,5989.76) v1@4465.11,5910.11 ; C4.2@4396.5,5850.51 cw(c4423.11,5823.9) 4423.11,5861.54 cw(c4423.11,5899.17) C4.2@4396.5,5872.56 ; 4414.49,5770 4381.54,5802.95 ; 4458.79,5906.46 ccw(c4450.91,5920.11) v1@4466.14,5916.04 ; v1(4470,5915) 4416.54,5861.54 ; R2.1@4586.81,5804.27 ccw(c4508.52,5806.16) 4563.9,5861.53 ; R8.1@4590.8,5588.57 ccw(c4567.55,5611.82) 4600.43,5611.82 ccw(c4633.32,5611.82) R8.1@4610.07,5588.57 ; R3.1@4590.8,5636.43 cw(c4567.55,5613.18) 4600.43,5613.18 cw(c4633.32,5613.18) R3.1@4610.07,5636.43 ; R3.1@4590.8,5663.57 ccw(c4567.55,5686.82) 4600.43,5686.82 ccw(c4633.32,5686.82) R3.1@4610.07,5663.57 ; R5.1@4590.8,5711.43 cw(c4567.55,5688.18) 4600.43,5688.18 cw(c4633.32,5688.18) R5.1@4610.07,5711.43 ; R5.1@4590.8,5738.57 ccw(c4567.55,5761.82) 4600.43,5761.82 ccw(c4633.32,5761.82) R5.1@4610.07,5738.57 ; R2.1@4590.8,5786.43 cw(c4567.55,5763.18) 4600.43,5763.18 cw(c4633.32,5763.18) R2.1@4610.07,5786.43 ; R3.1@4595.92,5641.55 ccw(c4622.77,5668.4) R3.1@4622.77,5630.43 ; 4596.91,5828.52 cw(c4572.99,5804.6) R2.1@4606.81,5803.78 ; R8.1@4600.43,5575 R3.1@4600.43,5650 ; R2.1@4600.43,5800 R5.1@4600.43,5725 R3.1@4600.43,5650 ; R2.1@4600.43,5825 4563.9,5861.54 ; R18.2@4606.92,6349.36 cw(c4548.04,6341.96) 4590,6300 ; R3.1@4610.07,5655.7 ccw(c4671.05,5716.68) R6.1@4671.05,5630.43 ; R18.2@4611.44,6369.16 ccw(c4549.13,6440) C5.2@4643.46,6440 ; R18.2@4624.65,6354.15 ccw(c4588.04,6395.77) 4643.46,6395.77 ; C5.2@4629.96,6428.27 cw(c4600.38,6411.19) 4633.38,6402.34 ; R18.2@4630.07,6360.7 ccw(c4683.64,6414.27) 4683.64,6338.5 ; 4632.1,6397.6 cw(c4671.82,6386.95) C5.2@4651.26,6422.56 ; C5.2@4632.44,6425.04 cw(c4605.83,6398.42) 4643.46,6398.42 cw(c4681.1,6398.42) C5.2@4654.49,6425.04 ; C5.2@4632.44,6454.96 ccw(c4590.05,6497.35) 4650,6497.35 ; C6.2@4632.44,6515.04 cw(c4590.05,6472.65) 4650,6472.65 ; C6.2@4632.44,6544.96 ccw(c4590.05,6587.35) 4650,6587.35 ; R1.1@4640.37,6614.93 cw(c4617.11,6591.68) 4650,6591.68 cw(c4682.89,6591.68) R1.1@4659.63,6614.93 ; R6.1@4661.43,5620.8 ccw(c4638.18,5597.55) 4638.18,5630.43 ccw(c4638.18,5663.32) R6.1@4661.43,5640.07 ; R1.1@4663.57,6614.93 cw(c4686.82,6591.68) 4686.82,6624.57 cw(c4686.82,6657.45) R1.1@4663.57,6634.2 ; v1(4675,5630.43) 4620,5630.43 R3.1@4600.43,5650 ; U1.64@4698.24,6338.5 4636.93,6338.5 R18.2@4620.43,6355 ; 4865.47,6525 ccw(c4818.33,6525) 4851.66,6558.34 ccw(c4885,6591.67) 4885,6544.53 ; 4885,6525 4785.43,6624.57 R1.1@4650,6624.57 4650,6446.54 C5.2@4643.46,6440 ; R11.1@4985.37,5655.07 ccw(c4962.11,5678.32) 4995,5678.32 ccw(c5027.89,5678.32) R11.1@5004.63,5655.07 ; 4995,5670.58 cw(c5072.02,5670.58) C3.2@5017.56,5725.04 ; C3.2@4995.51,5754.96 ccw(c4968.9,5781.58) 5006.54,5781.58 ccw(c5044.17,5781.58) C3.2@5017.56,5754.96 ; R15.2@5000.8,5801.43 cw(c4986.96,5787.59) R15.2@5006.54,5787.59 ; C3.2@5006.54,5768.77 cw(c5052.73,5768.77) R15.2@5020.07,5801.43 ; R11.1@5008.57,5635.8 cw(c5031.82,5612.55) 5031.82,5645.43 cw(c5031.82,5678.32) R11.1@5008.57,5655.07 ; R15.2@5020.07,5805.37 cw(c5043.32,5782.11) 5043.32,5815 cw(c5043.32,5847.89) R15.2@5020.07,5824.63 ; 5035.16,5645.43 ccw(c5035.16,5680.47) R9.1@5059.93,5655.7 ; 5038.2,5645.43 cw(c5038.2,5614.7) 5059.93,5636.43 cw(c5036.68,5613.18) 5069.57,5613.18 cw(c5102.45,5613.18) R9.1@5079.2,5636.43 ; 5047.13,5815 cw(c5047.13,5780.63) R14.2@5071.43,5804.93 ; 5049.22,5815 ccw(c5049.22,5846.41) R14.2@5071.43,5824.2 ; R4.1@5059.93,5561.43 cw(c5036.68,5538.18) 5069.57,5538.18 cw(c5102.45,5538.18) R4.1@5079.2,5561.43 ; R4.1@5059.93,5588.57 ccw(c5036.68,5611.82) 5069.57,5611.82 ccw(c5102.45,5611.82) R4.1@5079.2,5588.57 ; R14.2@5079.57,5815 R15.2@5010.43,5815 5006.54,5811.1 C3.2@5006.54,5740 4995,5728.46 R11.1@4995,5645.43 5065,5645.43 R9.1@5069.57,5650 R4.1@5069.57,5575 5069.57,5535.43 5095,5510 5095,5385 5110,5370 ; R14.2@5085,5814.57 5350,5814.57 5410,5874.57 2.4G.2@5410,5920 ; R14.2@5098.57,5804.93 cw(c5121.82,5781.68) 5121.82,5814.57 cw(c5121.82,5847.45) R14.2@5098.57,5824.2 ; R7.1@5140.97,5383.72 cw(c5110,5411.82) 5110,5370 ; R7.1@5168.57,5384.2 ccw(c5202.85,5418.48) 5202.85,5370 ; 5217.38,5409.23 cw(c5186.01,5394.5) 5210.51,5370 ; 5230.65,5390.14 ccw(c5213.42,5407.37) 5235.48,5417.73 ; 5250.51,5410 5210.51,5370 ; 2.4G.2@5394.21,5903.73 cw(c5374.68,5874.29) 5410,5874.29 ; 5410,5884.93 cw(c5440.07,5884.93) 2.4G.2@5418.81,5906.19 ; 4381.54,5802.95 C4.2@4381.54,5861.54 ; C4.2@4381.54,5861.54 4416.54,5861.54 ; 4416.53,5861.54 ccw(c4416.53,5838.39) 4397.97,5852.22 cw(c4416.53,5838.39) 4416.53,5861.54 ; 4416.53,5861.54 cw(c4416.53,5884.68) 4397.97,5870.85 ccw(c4416.53,5884.68) 4416.53,5861.54 ; 4416.54,5861.54 4563.9,5861.54 ; 4590,6300 4620.43,6330.43 R18.2@4620.43,6355 ; R18.2@4620.43,6355 4643.46,6378.03 C5.2@4643.46,6440 ; 5110,5370 5210.51,5370
  Bottom Layer w8: v1@2480,4695 v1(2475,4690) v1@2585,4690 ; v1@2482.07,4682.93 cw(c2499.14,4665.86) 2499.14,4690 cw(c2499.14,4714.14) v1@2482.07,4697.07 ; v1@2587.93,4682.93 ccw(c2570.86,4665.86) 2570.86,4690 ccw(c2570.86,4714.14) v1@2587.93,4697.07 ; v1@2590,4695 v1(2595,4690)
  Bottom Layer w20: RF.2@2296.19,5543.81 ccw(c2262.86,5577.14) 2310,5577.14 ccw(c2357.14,5577.14) RF.2@2323.81,5543.81 ; RF.2@2310,5530 2310,5630 2330,5650 U3.2@2600.83,5650 U3.4@2829.17,5650 ; P1.2@2314.69,6529.11 P1.2@2309.69,6524.11 2384.5,6524.11 2430.09,6569.7 ; P1.2@2323.5,6510.3 cw(c2356.83,6476.97) 2356.83,6524.11 cw(c2356.83,6571.25) P1.2@2323.5,6537.92 ; U3.2@2566.42,5643.15 ccw(c2549.89,5626.62) 2549.89,5650 ccw(c2549.89,5673.38) U3.2@2566.42,5656.85 ; v1(2597.2,6310.63) 2459.96,6310.63 2430.09,6340.5 2430.09,6569.7 ; U3.2@2635.23,5643.15 cw(c2651.77,5626.62) 2651.77,5650 cw(c2651.77,5673.38) U3.2@2635.23,5656.85 ; 2772.85,6586.37 ccw(c2811.77,6625.29) v1@2811.77,6570.25 ; U3.4@2802.84,5623.66 ccw(c2739.26,5560.08) 2739.26,5650 ccw(c2739.26,5739.92) U3.4@2802.84,5676.34 ; v1(2811.77,6566.25) 2792.97,6566.25 v1(2666.98,6692.24) ; v1(3091.57,6751.01) 3032.8,6692.24 v1(2666.98,6692.24) ; FB_Power.2@4116.19,6346.19 cw(c4082.86,6312.86) 4130,6312.86 cw(c4177.14,6312.86) FB_Power.2@4143.81,6346.19 ; FB_Power.2@4130,6360 4130,6285 4190,6225 4385,6225 4470,6140 v1(4470,5915) ; v1@4673.96,5626.57 cw(c4668.25,5605.23) R12.1@4687.38,5616.28 ; v1(4675,5630.43) 4709.57,5595.87 4709.57,5550.43 4725.66,5534.34 4915.69,5534.34 4955.43,5574.09 R13.1@4955.43,5590 4955.43,5635.43 4965,5645 v1(4995,5645) ; 4684.95,5620.48 cw(c4658.4,5593.94) R12.1@4695.94,5593.94 ; R12.1@4689.61,5615.83 ccw(c4709.57,5635.79) R12.1@4709.57,5607.56 ; R12.1@4699.93,5576.43 cw(c4676.68,5553.18) 4709.57,5553.18 cw(c4742.45,5553.18) R12.1@4719.2,5576.43 ; 4923.71,5542.37 ccw(c4880.01,5586.06) R13.1@4941.81,5586.06 ; R13.1@4945.8,5603.57 ccw(c4922.55,5626.82) 4955.43,5626.82 ccw(c4988.32,5626.82) R13.1@4965.07,5603.57 ; 2430.09,6569.7 2430.09,6666.87 2456.63,6693.41 2665.81,6693.41 v1(2666.98,6692.24)
5VCC: C4.2@3570,5559.53 C5.2@3149.53,5700 C6.2@3715.47,5590 C8.1@2327.09,5705 Ferrite.2@3500,5560.43 ISP.2 R1.2@3155.43,5620 R2.1@3579.57,5085 R3.1@3579.57,4975 R4.1@3775.43,5670 U1.4@2939.65,5355.75 U1.6@2939.65,5292.76 U1.18@3270.35,5261.26 U1.20@3270.35,5324.25 U2.4 U2.20 U3.3 | length 9447.2
  Top Layer w8: U1.18@3270.35,5261.26 3271.61,5260 3355,5260 3370,5245 ; U1.20@3270.35,5324.25 3360.75,5324.25 3370,5315 3370,5245 ; U1.18@3296.84,5256.43 cw(c3305.45,5247.82) 3305.45,5260 ; U1.18@3296.84,5266.09 ccw(c3311.53,5280.78) 3311.53,5260 ; U1.20@3296.84,5319.42 cw(c3308.49,5307.77) 3308.49,5324.25 cw(c3308.49,5340.73) U1.20@3296.84,5329.08 ; 3370,5095 3370,5245 ; R2.1@3580.47,5080 R2.1@3585.47,5085
  Top Layer w10: 3100,4943.1 3553.57,4943.1 ; 3415,5796.9 3420,5801.9 ; 3467.1,4943.1 ccw(c3467.1,5083.53) R3.1@3566.4,4984.23 ; 3491.24,4943.1 ccw(c3491.24,5059.39) R3.1@3573.47,4977.16 ; 3515.38,4943.1 ccw(c3515.38,5035.25) R3.1@3580.54,4970.09 ; 3539.53,4943.1 ccw(c3539.53,5011.1) R3.1@3587.61,4963.02 ; R3.1@3561.25,4967.71 cw(c3533.95,4962.72) 3553.57,4943.1 ; R3.1@3578.39,4952.48 ccw(c3576.37,4920.31) 3553.57,4943.1 ; R3.1@3585.47,4975 3553.57,4943.1
  Top Layer w20: v1(2305,5115) 2193.1,5115 2143.1,5065 ; C8.1@2327.09,5705 2382.09,5760 v1(2425,5760) 2461.9,5796.9 ; C8.1@2327.09,5730.43 ccw(c2327.09,5791.83) 2370.5,5748.42 ; v1(2830,5465) 2830,5736.9 ; U1.6@2939.65,5292.76 3158.5,5292.76 3190,5324.25 U1.20@3270.35,5324.25 ; U1.4@2939.65,5355.75 3009.25,5355.75 3070,5295 ; 3100,4943.1 2170,4943.1 2143.1,4970 2143.1,5065 ; C5.2@3141.29,5685.85 cw(c3121.39,5665.96) 3149.53,5665.96 cw(c3177.66,5665.96) C5.2@3157.77,5685.85 ; C5.2@3143.53,5715.9 ccw(c3126.05,5745) 3160,5745 ; R1.2@3149.53,5620 C5.2@3149.53,5700 3160,5710.47 3160,5745 ; 3149.53,5671.08 ccw(c3202.58,5671.08) R1.2@3165.07,5633.57 ; 3370,5095 3385,5080 R2.1@3580.47,5080 ; Ferrite.2@3490.37,5570.07 ccw(c3467.11,5593.32) 3500,5593.32 ccw(c3532.89,5593.32) Ferrite.2@3509.63,5570.07 ; Ferrite.2@3500,5560.43 3500,5745 3500,5785 3488.1,5796.9 ; 3544.11,5080 ccw(c3544.11,5116.52) R2.1@3569.93,5090.7 ; 3549.25,5080 cw(c3549.25,5050.74) 3569.93,5071.43 cw(c3532.42,5033.92) 3585.47,5033.92 ; R3.1@3569.93,4988.57 ccw(c3532.42,5026.08) 3585.47,5026.08 ; R3.1@3585.47,4975 R2.1@3585.47,5085 ; v1(3805,5745) 3753.1,5796.9 3488.1,5796.9 ; 2143.1,5065 2143.1,5780 2160,5796.9 2461.9,5796.9 ; 2461.9,5796.9 2770,5796.9 ; 2770,5796.9 3415,5796.9 3488.1,5796.9 ; 2770,5796.9 2830,5736.9 ; 2830,5736.9 2856.9,5710 2945,5710 2987.7,5752.7 3152.3,5752.7 3160,5745
  Bottom Layer w8: 2889.57,5490.43 U2.4@3159.17,5490.43 ; U2.4@3122.68,5488.39 ccw(c3117.75,5483.46) 3117.75,5490.43 ccw(c3117.75,5497.41) U2.4@3122.68,5492.48
  Bottom Layer w10: U2.20@3430.83,5618.39 3628.86,5618.39 ; C4.2@3570,5559.53 3628.86,5618.39 ; C4.2@3575.91,5576.18 ccw(c3575.91,5602.13) 3594.25,5583.78 ; C4.2@3582.56,5559.53 cw(c3612.88,5559.53) C4.2@3591.44,5580.97 ; C4.2@3592.56,5559.53 cw(c3647.02,5559.53) 3608.51,5598.04 ; C6.2@3701.46,5581.01 ccw(c3685,5570.45) 3685,5590 ; C6.2@3701.46,5598.99 cw(c3685,5609.55) 3685,5590 ; C6.2@3713.11,5612.39 ccw(c3705.7,5664.16) 3747.55,5632.8 ; C6.2@3714.53,5602.49 ccw(c3710.54,5630.36) C6.2@3733.07,5613.48 ; C6.2@3715.47,5610.04 C6.2@3715.47,5590 ; C6.2@3731.96,5598.27 cw(c3759.79,5602.25) 3737.29,5619.11 ; 3743.16,5626.94 cw(c3785.59,5595.15) R4.1@3778.07,5647.63 ; 3750,5636.07 ccw(c3720.48,5658.19) R4.1@3757,5663.42 ; R4.1@3757.64,5646.26 cw(c3780.75,5628.94) R4.1@3776.66,5657.53 ; R4.1@3775.43,5670 C6.2@3715.47,5590 ; 3628.86,5618.39 3656.61,5618.39 3685,5590 ; 3685,5590 C6.2@3715.47,5590
  Bottom Layer w20: v1(2305,5115) 2365,5175 ISP.2@2475,5175 ; v1(2425,5760) 2580.28,5760 2600.28,5740 U3.3@2600.83,5740.55 ; ISP.2@2461.19,5161.19 ccw(c2427.86,5127.86) 2427.86,5175 ccw(c2427.86,5222.14) ISP.2@2461.19,5188.81 ; 2502.93,5760 cw(c2502.93,5670.22) U3.3@2566.42,5733.7 ; 2551.22,5760 cw(c2551.22,5718.5) U3.3@2580.56,5747.85 ; v1(2830,5465) 2855.43,5490.43 2889.57,5490.43 ; R4.1@3769.16,5686.03 ccw(c3738.57,5745) v1(3805,5745) 3805,5699.57 ; R4.1@3775.43,5670 3805,5699.57 ; R4.1@3775.58,5687.56 ccw(c3776.01,5728.56) 3805,5699.57 ; R4.1@3778.37,5668.28 ccw(c3755.64,5712.09) 3805,5712.09 ; R4.1@3789.06,5673.94 cw(c3812.44,5673.94) R4.1@3795.9,5690.47
\R\E\S\E\T\: ISP.5 R1.1@3084.57,5620 U1.29@3089.25,5505.35 | length 1514
  Top Layer w8: v1@3005,5645 cw(c3005,5620.86) 3022.07,5637.93 cw(c3039.14,5655) v1@3015,5655 ; v1(3005,5655) 3040,5620 ; R1.1@3070.09,5606.75 ccw(c3040,5579.2) 3040,5620 ; R1.1@3070.09,5633.25 cw(c3040,5660.8) 3040,5620 ; R1.1@3070.69,5602.19 cw(c3022.94,5554.43) 3090.47,5554.43 ; R1.1@3075.99,5612.15 ccw(c3058.17,5595.84) 3058.17,5620 ccw(c3058.17,5644.16) R1.1@3075.99,5627.85 ; R1.1@3076.35,5607.85 cw(c3042.25,5573.75) 3090.47,5573.75 ; R1.1@3082.01,5613.5 cw(c3061.57,5593.06) R1.1@3090.47,5593.06 ; U1.29@3084.42,5531.84 ccw(c3069.82,5546.44) 3090.47,5546.44 ; U1.29@3089.25,5505.35 3090.47,5506.57 3090.47,5620 3040,5620 ; 3090.47,5540.54 ccw(c3102.79,5540.54) U1.29@3094.08,5531.84 ; 3090.47,5582.95 cw(c3117.68,5582.95) R1.1@3098.44,5602.19
  Bottom Layer w8: ISP.5@2575,5375 2580,5370 2695,5370 2715,5390 2715,5520 2730,5535 2885,5535 2900,5550 2900,5690 2925,5715 2965,5715 3005,5675 ; ISP.5@2581.74,5381.74 ccw(c2610.07,5410.07) 2610.07,5370 ; ISP.5@2587.39,5362.61 cw(c2605.24,5344.76) 2605.24,5370 ; ISP.5@2587.39,5387.39 ccw(c2629.39,5429.39) 2629.39,5370 ; ISP.5@2593.05,5356.95 cw(c2624.56,5325.44) 2624.56,5370 ; ISP.5@2593.05,5393.05 ccw(c2648.7,5448.7) 2648.7,5370 ; v1@2999,5663 ccw(c2990,5675) 3005,5675 ; v1(3005,5655) 3005,5675 ; v1@3011,5663 cw(c3020,5675) 3005,5675
AUX_TWI0: Gyro.7
AUX_TWI1: Gyro.6
BUS_SEL0: "SCL MUX/DEMUX.11" "SDA MUX/DEMUX.11" U1.11@4631.5,6070.79 | length 3004.6
  Top Layer w10: 4414.49,5520 4480,5520 4498.1,5501.9 4498.1,5362.5 4469.4,5333.8 4135.01,5333.8 4093.8,5375.01 4093.8,6029.99 4133.72,6069.91 U1.11@4630.62,6069.91 ; 4450.8,5515.18 cw(c4462.43,5503.56) 4462.43,5520 cw(c4462.43,5536.44) 4450.8,5524.82 ; U1.11@4631.5,6070.79 U1.11@4630.62,6069.91 ; v1@4840.16,6054.16 ccw(c4818.43,6054.16) 4833.8,6069.53 ccw(c4849.16,6084.89) v1@4849.16,6063.16 ; v1(4849.16,6054.16) 4833.41,6069.91 U1.11@4630.62,6069.91 ; v1@5250.51,5660 v1(5255,5660)
  Bottom Layer w10: v1@4849.16,6045.16 cw(c4849.16,6023.43) 4864.53,6038.8 cw(c4879.89,6054.16) v1@4858.16,6054.16 ; v1(4849.16,6054.16) 4870,6033.33 4870,5821.2 4895,5796.2 5110.6,5796.2 5122.5,5808.1 5226.9,5808.1 5255,5780 v1(5255,5660) ; v1@5248.64,5666.36 ccw(c5233.27,5681.73) 5255,5681.73 ccw(c5276.73,5681.73) v1@5261.36,5666.36
BUS_SEL1: "SCL MUX/DEMUX.10" "SDA MUX/DEMUX.10" U1.12@4631.5,6051.1 | length 2836.5
  Top Layer w10: 4414.49,5470 4470,5470 4480,5460 4480,5370 4461.9,5351.9 4142.5,5351.9 4111.9,5382.5 4111.9,6022.5 4140.51,6051.1 U1.12@4631.5,6051.1 4778.9,6051.1 v1(4800,6030) ; 4450.8,5465.18 cw(c4462.43,5453.56) 4462.43,5470 cw(c4462.43,5486.44) 4450.8,5474.82 ; v1@4791,6030 ccw(c4769.27,6030) 4784.64,6045.36 ccw(c4800,6060.73) v1@4800,6039 ; v1(5170,5710) 5250.51,5710 ; v1@5176.36,5703.64 cw(c5191.73,5688.27) 5191.73,5710 cw(c5191.73,5731.73) v1@5176.36,5716.36 ; 5214.2,5705.18 ccw(c5202.57,5693.56) 5202.57,5710 ccw(c5202.57,5726.44) 5214.2,5714.82
  Bottom Layer w10: v1@4800,6021 cw(c4800,5999.27) 4815.36,6014.64 cw(c4830.73,6030) v1@4809,6030 ; v1(4800,6030) 4851.9,5978.1 4851.9,5806.2 4880,5778.1 5118.1,5778.1 5130,5790 5170,5790 5185,5775 5185,5725 ; v1(5170,5710) 5185,5725 ; v1@5170.15,5719 ccw(c5170.51,5739.49) 5185,5725 ; v1@5179,5710.15 cw(c5199.49,5710.51) 5185,5725
BUS_SEL2: "SCL MUX/DEMUX.9" "SDA MUX/DEMUX.9" U1.13@4631.5,6031.42 | length 2451.5
  Top Layer w10: 4409.67,5415.18 cw(c4398.05,5403.56) 4414.49,5403.56 cw(c4430.93,5403.56) 4419.3,5415.18 ; 4414.49,5420 4414.49,5394.49 4390,5370 4150,5370 4130,5390 4130,6015 4146.42,6031.42 U1.13@4631.5,6031.42 4693.58,6031.42 v1(4715,6010) ; v1@4706,6010 ccw(c4684.27,6010) 4699.64,6025.36 ccw(c4715,6040.73) v1@4715,6019 ; v1(5150,5760) 5235,5760 ; v1@5156.36,5753.64 cw(c5171.73,5738.27) 5171.73,5760 cw(c5171.73,5781.73) v1@5156.36,5766.36 ; 5214.2,5755.18 ccw(c5202.57,5743.56) 5202.57,5760 ccw(c5202.57,5776.44) 5214.2,5764.82
  Bottom Layer w10: v1(4715,6010) 4768.8,6010 4833.8,5945 4833.8,5798.7 4872.5,5760 v1(5150,5760) ; v1@4721.36,6003.64 cw(c4736.73,5988.27) 4736.73,6010 cw(c4736.73,6031.73) v1@4721.36,6016.36 ; v1@5143.64,5753.64 ccw(c5128.27,5738.27) 5128.27,5760 ccw(c5128.27,5781.73) v1@5143.64,5766.36
CE: 2.4Ghz.1 P1.3 RF.3 U1.23@3270.35,5418.74 | length 3413.8
  Top Layer w8: v1(2405,4990) v1(2620,4990) ; v1@2412.07,4982.93 cw(c2429.14,4965.86) 2429.14,4990 cw(c2429.14,5014.14) v1@2412.07,4997.07 ; v1@2612.93,4982.93 ccw(c2595.86,4965.86) 2595.86,4990 ccw(c2595.86,5014.14) v1@2612.93,4997.07 ; U1.23@3270.35,5418.74 3445,5418.74 3465,5398.74 3465,5200 3435,5170 ; U1.23@3296.84,5413.91 cw(c3308.49,5402.26) 3308.49,5418.74 cw(c3308.49,5435.22) U1.23@3296.84,5423.57 ; v1(3415,5170) 3435,5170 ; v1@3423,5164 cw(c3435,5155) 3435,5170 ; v1@3423,5176 ccw(c3435,5185) 3435,5170
  Top Layer w10: P1.3@2209.69,6424.11 2259.03,6473.45 2354.85,6473.45 2374.75,6493.35 2637.1,6493.35 2.4Ghz.1@2637.98,6494.23 ; P1.3@2209.69,6438.64 ccw(c2209.69,6473.71) 2234.49,6448.91 ccw(c2259.29,6424.11) P1.3@2224.22,6424.11 ; P1.3@2209.69,6448.64 ccw(c2209.69,6507.85) 2251.56,6465.98 ccw(c2293.43,6424.11) P1.3@2234.22,6424.11
  Bottom Layer w8: RF.3@2190.5,5413.52 ccw(c2155,5383.52) 2155,5430 ; RF.3@2190.5,5446.48 cw(c2155,5476.48) 2155,5430 ; RF.3@2196.61,5418.69 ccw(c2172.24,5398.09) 2172.24,5430 ccw(c2172.24,5461.91) RF.3@2196.61,5441.31 ; RF.3@2210,5430 2155,5430 ; v1@2397.93,4982.93 ccw(c2380.86,4965.86) 2380.86,4990 ccw(c2380.86,5014.14) v1@2397.93,4997.07 ; v1(2405,4990) 2157.1,4990 2137.1,5010 2137.1,5412.1 2155,5430 ; v1@2620,4980 cw(c2620,4955.86) 2637.07,4972.93 cw(c2654.14,4990) v1@2630,4990 ; v1(2620,4990) 2650,4960 3370,4960 3415,5005 v1(3415,5170) ; v1@3407.93,5162.93 cw(c3390.86,5145.86) 3415,5145.86 cw(c3439.14,5145.86) v1@3422.07,5162.93
CSN: RF.4 U1.14@3152.24,5174.65 | length 1597.8
  Top Layer w8: v1@2387.93,5372.93 cw(c2370.86,5355.86) 2395,5355.86 cw(c2419.14,5355.86) v1@2402.07,5372.93 ; v1(2395,5380) 2395,5125 2490,5030 2655,5030 2715,4970 3020,4970 3152.24,5102.24 U1.14@3152.24,5174.65 ; U1.14@3147.42,5148.16 cw(c3135.76,5136.51) 3152.24,5136.51 cw(c3168.73,5136.51) U1.14@3157.07,5148.16
  Bottom Layer w8: RF.4@2310,5430 2385,5430 2395,5420 v1(2395,5380) ; RF.4@2322.39,5417.61 cw(c2352.32,5387.68) 2352.32,5430 cw(c2352.32,5472.32) RF.4@2322.39,5442.39 ; RF.4@2328.05,5411.95 cw(c2371.63,5368.37) 2371.63,5430 cw(c2371.63,5491.63) RF.4@2328.05,5448.05 ; v1@2387.93,5387.07 ccw(c2370.86,5404.14) 2395,5404.14 ccw(c2419.14,5404.14) v1@2402.07,5387.07